# EAGLE board SIM7000 Shield ES (EAGLE 9.4.0)
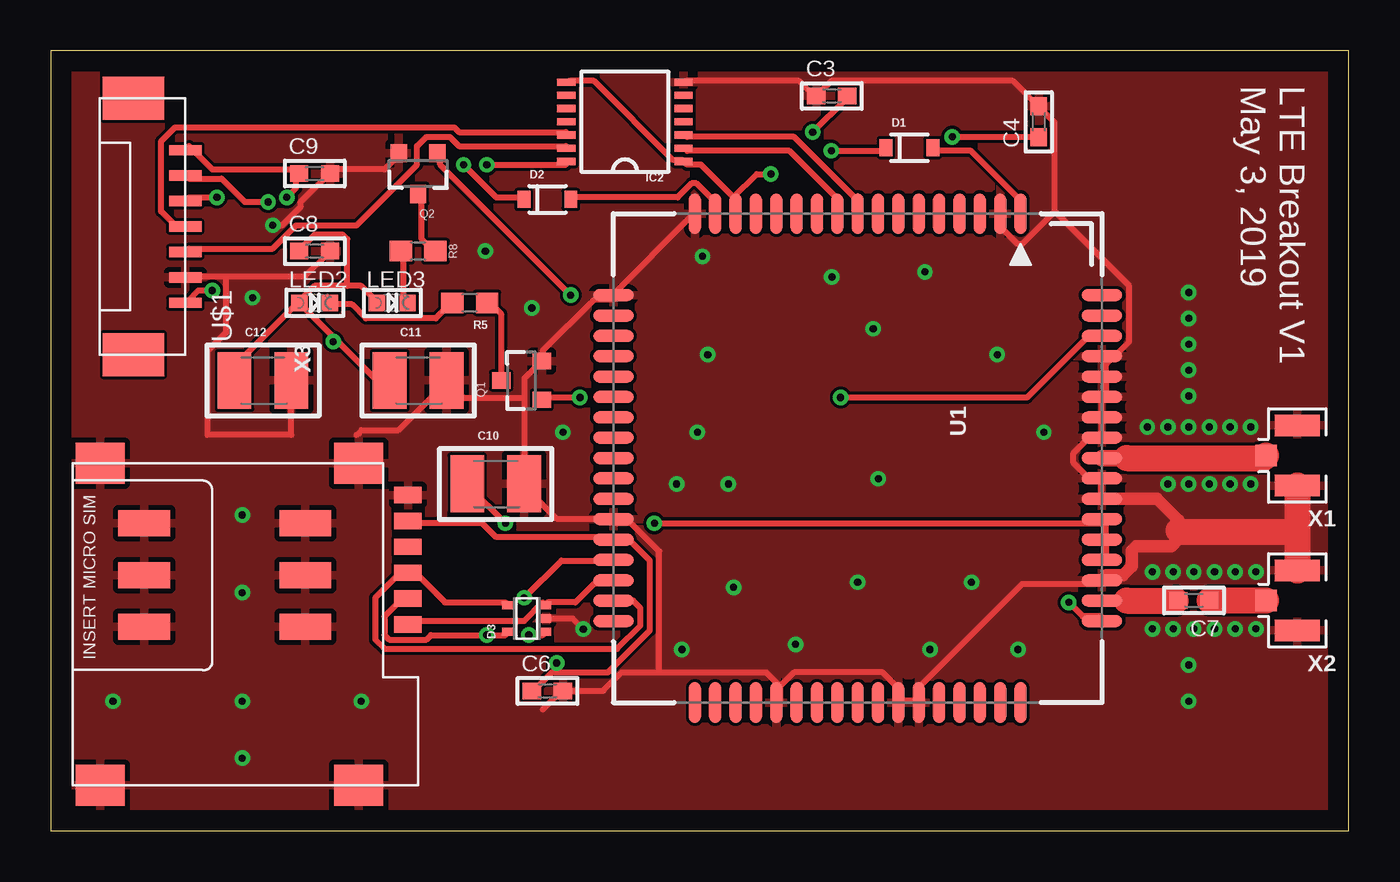
[diagram p0: board, top side]
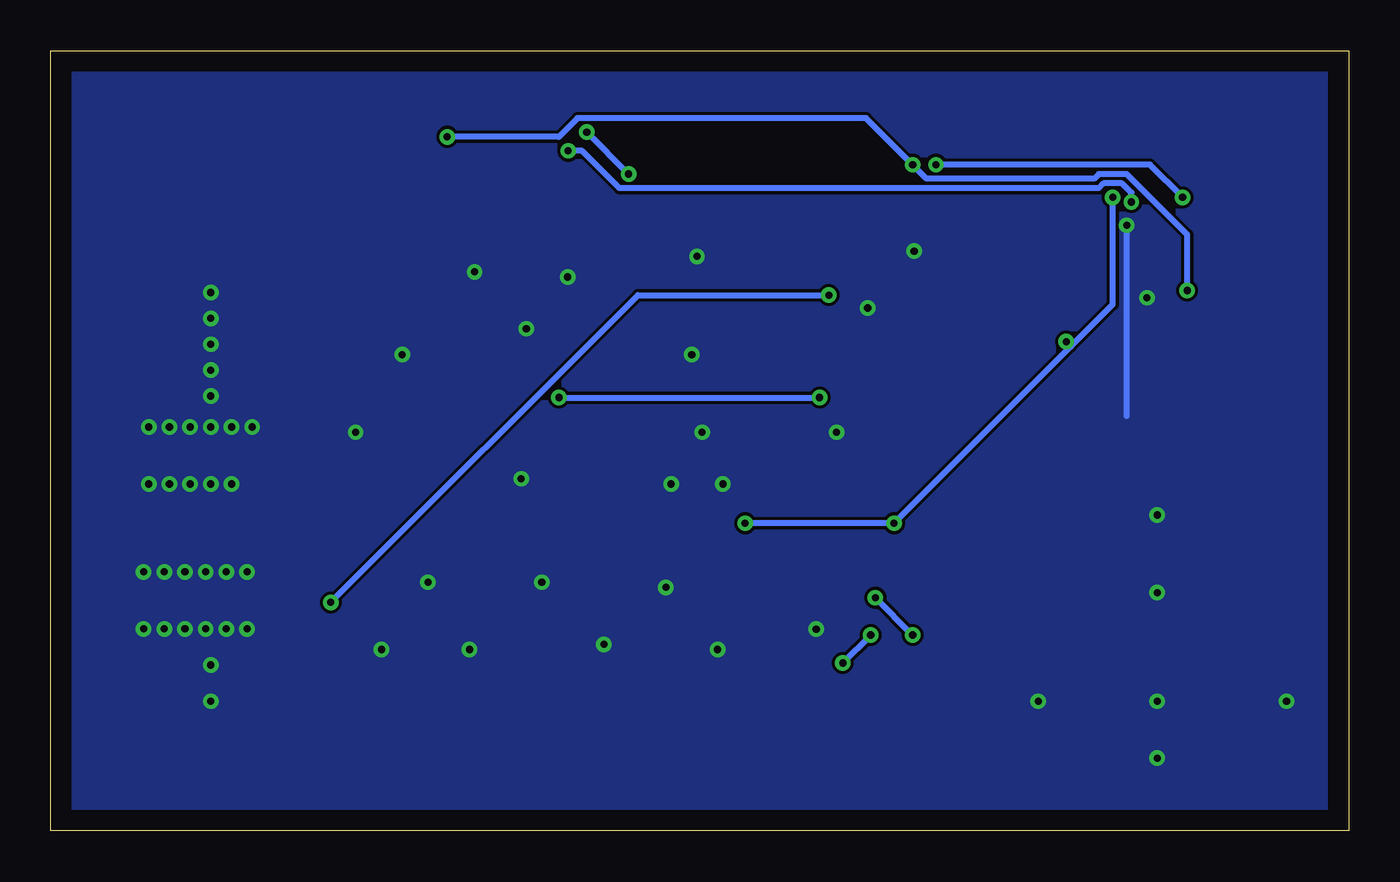
[diagram p1: board, bottom side, seen from below]

Size 63.73 x 38.28 mm. Coordinates in mm from the lower left corner, seen from the top.
Outline: 0,0 63.73,0 63.73,38.28 0,38.28 0,0
Copper layers (1*16): Top 0.035mm / dielectric 1.5mm / Bottom 0.035mm
Design rules "default *": minimum track width 10mil, minimum drill 0.35mm, track to track 6mil, track to pad 6mil, pad to pad 6mil, via to via 6mil, smd to smd 6mil, copper to edge 40mil, drill to drill 6mil, minimum pad ring 10mil, minimum via ring 8mil, stop-mask expansion 4mil, vias tented up to drill 20mil, thermal gap 10mil
Net classes: 0 default: width 0.305 mm; 1 power: width 0.406 mm

## Footprints (pad centres in the part's own frame; a part is rotated, then mirrored left to right if it is on the bottom)
CAP_0603 = smd 0.9 x 0.8: 1 -0.762,0; 2 0.762,0
1210 = smd 1.651 x 2.794: 1 -1.397,0; 2 1.397,0
SOD-323 = smd 0.63 x 0.83: A 1.15,0; C -1.15,0
SOT-353 = smd 0.4 x 0.5: 1 -0.65,-0.95; 2 0,-0.95; 3 0.65,-0.95; 4 0.65,0.95; 5 -0.65,0.95
TSSOP-14 = smd 0.9 x 0.35: 1 -2.875,1.95; 2 -2.875,1.3; 3 -2.875,0.65; 4 -2.875,0; 5 -2.875,-0.65; 6 -2.875,-1.3; 7 -2.875,-1.95; 8 2.875,-1.95; 9 2.875,-1.3; 10 2.875,-0.65; 11 2.875,0; 12 2.875,0.65; 13 2.875,1.3; 14 2.875,1.95
MICROBUILDER_CHIPLED_0603 = smd 0.8 x 0.8: A 0,-0.75; C 0,0.75
SOT23-3 = smd 0.8 x 0.9: 1 -0.95,-1; 2 0.95,-1; 3 0,1
0603 = smd 1.1 x 1: 1 -0.85,0; 2 0.85,0
SIM7000 = smd 2 x 0.6: 1 -12,8; 2 -12,7; 3 -12,6; 4 -12,5; 5 -12,4; 6 -12,3; 7 -12,2; 8 -12,1; 9 -12,0; 10 -12,-1; 11 -12,-2; 12 -12,-3; 13 -12,-4; 14 -12,-5; 15 -12,-6; 16 -12,-7; 17 -12,-8; 35 12,-8; 36 12,-7; 37 12,-6; 38 12,-5; 39 12,-4; 40 12,-3; 41 12,-2; 42 12,-1; 43 12,0; 44 12,1; 45 12,2; 46 12,3; 47 12,4; 48 12,5; 49 12,6; 50 12,7; 51 12,8 | smd 0.6 x 2: 18 -8,-12; 19 -7,-12; 20 -6,-12; 21 -5,-12; 22 -4,-12; 23 -3,-12; 24 -2,-12; 25 -1,-12; 26 0,-12; 27 1,-12; 28 2,-12; 29 3,-12; 30 4,-12; 31 5,-12; 32 6,-12; 33 7,-12; 34 8,-12; 52 8,12; 53 7,12; 54 6,12; 55 5,12; 56 4,12; 57 3,12; 58 2,12; 59 1,12; 60 0,12; 61 -1,12; 62 -2,12; 63 -3,12; 64 -4,12; 65 -5,12; 66 -6,12; 67 -7,12; 68 -8,12
JST1.25_7P = smd 0.5 x 1.6: 1 0,0; 2 1.25,0; 3 2.5,0; 4 3.75,0; 5 5,0; 6 6.25,0; 7 7.5,0 | smd 2.1 x 3: 8 -2.55,2.55; 9 10.05,2.55
U.FL = smd 2.2 x 1.05: 1 0,1.475; 2 0,-1.475 | smd 1.05 x 1.05: 3 1.525,0
MICROSIM_SOCKET = smd 0.8 x 1.35: C1 4.865,13.215; C2 7.405,13.215; C3 9.945,13.215; C5 3.595,13.215; C6 6.135,13.215; C7 8.675,13.215 | smd 2 x 2.4: GND@1 2.035,10.79; GND@2 17.835,10.79; GND@3 2.035,-1.89; GND@4 17.835,-1.89 | smd 1.27 x 2.54: GND@5 4.985,8.18; GND@6 7.525,8.18; GND@7 10.065,8.18; GND@8 4.985,0.26; GND@9 7.525,0.26; GND@10 10.065,0.26

## Placement (x,y rotation side)
C3  0.1uF  [CAP_0603]  38.35,36.07 0 top
C4  0.1uF  [CAP_0603]  48.51,34.8 90 top
C6  0.22uF  [CAP_0603]  24.38,6.86 0 top
C7  33pF  [CAP_0603]  56.13,11.3 180 top
C8  0.1uF  [CAP_0603]  12.95,28.45 0 top
C9  1uF  [CAP_0603]  12.95,32.26 0 top
C10  100uF  [1210]  21.84,17.02 0 top
C11  100uF  [1210]  18.03,22.1 0 top
C12  100uF  [1210]  10.41,22.1 0 top
D1  250mA/100V  [SOD-323]  42.16,33.53 0 top
D2  250mA/100V  [SOD-323]  24.38,30.99 0 top
D3  MSQA6V1W5T2G  [SOT-353]  23.37,10.41 90 top
IC2  TXB0104  [TSSOP-14]  28.19,34.8 180 top
LED2  Green  [MICROBUILDER_CHIPLED_0603]  12.95,25.91 270 top
LED3  Blue  [MICROBUILDER_CHIPLED_0603]  16.76,25.91 270 top
Q1  BSS138L  [SOT23-3]  23.11,22.1 90 top
Q2  BSS138L  [SOT23-3]  18.03,32.26 180 top
R5  1k  [0603]  20.57,25.91 180 top
R8  1k  [0603]  18.03,28.45 180 top
U1  [SIM7000]  39.62,18.29 270 top
U$1  JST_1.25_7P  [JST1.25_7P]  6.6,25.91 90 top
X1  LTE-uFL  [U.FL]  61.21,18.41 180 top
X2  GNSS-uFL  [U.FL]  61.21,11.3 180 top
X3  [MICROSIM_SOCKET]  4.32,20.07 270 top

## Library data of the parts
C3 C4 C6-C9 LED2 LED3 R5 R8 = Scott-Electrical
C10-C12 = TimWoo-Capacitors
D1 D2 = TimWoo-Diodes; PROD_ID: DIO-09646
D3 = TimWoo-Diodes
IC2 = Scott-ICs
Q1 Q2 = TimWoo-MOSFETs
U1 = TimWoo-RF
U$1 X3 = Scott-Connectors
X1 X2 = TimWoo-Connectors

## Nets
1.8V: C3.2 IC2.1 IC2.8 U1.15
3V3: C8.1 C9.1 C10.1 C11.1 C12.1 LED2.A LED3.A U1.55 U1.56 U1.57 U$1.7
5V: C4.1 IC2.14 U$1.1
GND: C3.1 C4.2 C6.2 C8.2 C9.2 C10.2 C11.2 C12.2 D3.2 IC2.7 Q1.2 Q2.2 U1.2 U1.17 U1.18 U1.29 U1.39 U1.45 U1.46 U1.54 U1.58 U1.59 U1.61 U1.62 U1.63 U1.64 U1.65 U$1.2 X1.1 X1.2 X2.1 X2.2 X3.C5 X3.GND@1 X3.GND@2 X3.GND@3 X3.GND@4 X3.GND@5 X3.GND@6 X3.GND@7 X3.GND@8 X3.GND@9 X3.GND@10
LTE_PWR: D1.C U$1.6
LTE_RST: D2.C U$1.5
LTE_RXD: IC2.2 U1.10
LTE_TXD: IC2.3 U1.9
N$1: C7.2 U1.53
N$2: D1.A U1.1
N$3: C7.1 X2.3
N$4: Q1.3 R5.1
N$5: LED2.C R5.2
N$9: LED3.C R8.2
N$10: Q2.3 R8.1
NETLIGHT: Q2.1 U1.52
NRESET: D2.A U1.16
PWR_STAT: Q1.1 U1.66
RF_ANT: U1.60 X1.3
SIM_CLK: D3.3 U1.32 X3.C3
SIM_DATA: D3.5 U1.31 X3.C7
SIM_RST: D3.4 U1.33 X3.C2
SIM_VCC: C6.1 D3.1 U1.30 X3.C1
UC_RXD: IC2.12 U$1.4
UC_TXD: IC2.13 U$1.3

## Tracks (layer width: path | path; a pad name or v marks a point on that pad's centre or on a via)
1.8V  (via drill 0.35)
  Top 0.305: 33.53,31.09 31.93,32.69 31.24,32.69 IC2.1 31.01,32.92 30.56,32.92 26.67,36.8 25.53,36.8 IC2.8 | 33.53,31.09 33.53,30.4 U1.15 33.53,31.09 | v37.41,34.29 39.01,35.89 C3.2 | v35.36,32.23 34.67,32.23 33.53,31.09
  Bottom 0.305: v35.36,32.23 v37.41,34.29
3V3  (via drill 0.35)
  Top 0.305: 14.55,26.75 15.24,26.75 15.93,26.06 LED3.A | 14.55,26.75 12.95,26.75 12.27,26.06 LED2.A | 14.55,26.75 14.55,29.03 14.33,29.26 12.95,29.26 12.27,28.57 C8.1 | C12.1 9.07,22.17 9.07,22.86 12.04,25.83 LED2.A | 14.1,24 12.27,25.83 LED2.A | 14.1,24 15.93,22.17 16.61,22.17 C11.1 | U$1.7 6.78,33.6 7.92,32.46 12.04,32.46 C9.1 12.04,32.23 12.04,31.55 v11.58,31.09 | U1.55 51.82,13.49 51.82,14.17 U1.56 51.82,14.4 51.82,15.09 U1.57 51.59,15.09 v29.64,15.09 | v22.33,15.09 20.5,16.92 C10.1 | v13.87,24 14.1,24
  Bottom 0.305: v29.64,15.09 v22.33,15.09 13.64,23.77 | v11.58,31.09 11.58,25.83 13.64,23.77 | 13.64,23.77 v13.87,24
5V  (via drill 0.35)
  Top 0.305: v21.41,32.69 25.3,32.69 IC2.14 | v7.92,26.52 7.24,26.52 6.78,26.06 U$1.1 | v44.27,34.06 48.39,34.06 C4.1
  Bottom 0.305: v7.92,26.52 7.92,29.26 10.9,32.23 12.27,32.23 12.5,32 20.73,32 v21.41,32.69 23.7,34.98 37.87,34.98 38.79,34.06 v44.27,34.06
GND  (via drill 0.35)
  Top 0.305: IC2.7 31.24,36.8 36.73,36.8 37.41,36.12 C3.1 38.33,36.8 47.24,36.8 48.39,35.66 C4.2 48.62,35.43 49.3,34.75 49.3,30.4 | 49.3,30.4 47.7,28.8 47.47,28.8 46.79,29.49 46.79,30.18 U1.2 | 51.82,22.17 51.82,21.49 U1.63 51.59,21.26 51.59,20.35 U1.62 51.59,20.12 51.59,19.43 U1.61 51.59,19.2 50.9,19.2 50.22,18.52 50.22,18.06 50.9,17.37 51.59,17.37 U1.59 51.59,17.14 51.59,16.46 U1.58 51.82,16.23 | 51.82,22.86 51.82,22.4 U1.64 51.82,22.17 | 51.82,22.86 51.82,23.09 U1.65 | 49.3,30.4 52.96,26.75 52.96,24 51.82,22.86 | U1.17 31.47,30.18 27.58,26.29 U1.18 27.58,26.06 26.67,26.06 24.16,23.55 24.16,23.09 Q1.2 23.93,22.86 23.24,22.17 23.24,21.26 | 23.24,21.26 C10.2 23.24,16.92 24.84,15.32 27.58,15.32 U1.29 27.81,15.09 28.5,15.09 29.87,13.72 29.87,7.77 | 8.61,27.2 6.78,27.2 U$1.2 | 8.61,27.2 12.5,27.2 13.64,28.35 C8.2 | 15.01,19.43 15.11,19.48 15.24,19.66 17.07,19.66 19.36,21.95 C11.2 20.27,21.26 23.24,21.26 | C12.2 11.81,19.43 7.7,19.43 7.7,23.55 8.61,24.46 8.61,27.2 | 35.81,7.09 35.81,6.4 U1.39 35.81,7.09 | 35.81,7.09 36.5,7.77 40.84,7.77 41.53,7.09 41.53,6.4 U1.45 41.76,6.4 42.44,6.4 U1.46 42.67,6.4 42.67,7.09 47.7,12.12 51.59,12.12 U1.54 | Q2.2 17.07,33.15 16.38,32.46 13.87,32.46 C9.2 13.64,32.23 12.27,30.86 12.27,30.63 11.35,29.72 v10.9,29.72 | 24.16,5.94 25.07,6.86 C6.2 27.13,6.86 28.04,7.77 29.87,7.77 | 35.81,7.09 35.13,7.77 29.87,7.77 | 51.82,22.17 51.62,22.17 | D3.2 25.62,10.41 v26.15,9.89
  Top 0.61: U1.58 54.32,16.29 55.37,15.24 55.37,14.73 55.37,14.32 55.02,13.97 53.31,13.97 53.08,13.75 53.08,12.97 52.64,12.53 51.87,12.53 U1.54
  Top 1.27: X1.1 61.21,14.66 | 61.21,14.66 X2.2 | 61.21,14.66 55.45,14.66 55.37,14.73
  Bottom 0.305: 10.9,20.35 v10.9,29.72
  other vias: 53.85,19.81 54.86,19.81 55.88,19.81 56.9,19.81 57.91,19.81 58.93,19.81 54.86,17.02 55.88,17.02 56.9,17.02 57.91,17.02 58.93,17.02 54.1,12.7 55.12,12.7 56.13,12.7 57.15,12.7 58.17,12.7 59.18,12.7 54.1,9.91 55.12,9.91 56.13,9.91 57.15,9.91 58.17,9.91 59.18,9.91 55.88,21.34 55.88,22.61 55.88,23.88 55.88,25.15 55.88,26.42 55.88,8.13 55.88,6.35 47.5,8.89 43.18,8.89 45.21,12.19 39.62,12.19 36.58,9.14 33.53,11.94 30.99,8.89 31.75,19.56 33.27,17.02 30.73,17.02 48.77,19.56 40.64,17.27 42.93,27.43 40.39,24.64 46.48,23.37 32.26,23.37 38.35,27.18 32,28.19 25.15,19.56 21.34,28.45 23.62,25.65 9.91,26.16 9.4,15.49 9.4,11.68 9.4,6.35 3.05,6.35 15.24,6.35 9.4,3.56
  pour Top: -0.51,39.88 -0.51,-1.02 67.56,-1.02 67.56,39.88
  pour Bottom: -0.76,40.39 -0.76,-1.02 68.07,-1.02 68.07,40.39
LTE_PWR  (via drill 0.35)
  Top 0.305: v38.33,33.38 40.84,33.38 D1.C | v10.67,30.86 9.52,30.86 8.38,32 6.78,32 U$1.6
  Bottom 0.305: v38.33,33.38 37.64,33.38 35.81,31.55 12.27,31.55 12.04,31.78 11.12,31.78 10.67,31.32 v10.67,30.86
LTE_RST  (via drill 0.35)
  Top 0.305: v20.27,32.69 21.87,31.09 23.01,31.09 D2.C | v8.15,31.09 6.78,31.09 U$1.5
  Bottom 0.305: v20.27,32.69 9.75,32.69 v8.15,31.09
LTE_RXD
  Top 0.305: IC2.2 31.24,33.38 36.27,33.38 38.56,31.09 38.56,30.4 U1.10
LTE_TXD
  Top 0.305: IC2.3 31.24,34.06 36.5,34.06 39.47,31.09 39.47,30.4 U1.9
N$1
  Top 0.305: 55.24,11.28 C7.2
  Top 0.61: U1.53 52.83,11.29
  Top 1.27: 52.83,11.29 55.23,11.29 55.24,11.28
N$2
  Top 0.305: D1.A 43.36,33.38 45.19,33.38 47.47,31.09 47.47,30.4 U1.1
N$3
  Top 1.27: C7.1 X2.3
N$4
  Top 0.305: Q1.3 22.1,22.17 22.1,25.38 21.64,25.83 R5.1
N$5
  Top 0.305: LED2.C 13.87,25.83 14.78,25.83 15.47,25.15 18.9,25.15 19.58,25.83 R5.2
N$9
  Top 0.305: LED3.C 17.3,26.06 17.3,28.35 R8.2
N$10
  Top 0.305: Q2.3 18.21,31.09 18.21,29.03 18.67,28.57 R8.1
NETLIGHT  (via drill 0.35)
  Top 0.305: v25.53,26.29 19.13,32.69 19.13,33.15 Q2.1 | v49.99,11.2 50.67,10.52 51.59,10.52 U1.52
  Bottom 0.305: v25.53,26.29 34.9,26.29 v49.99,11.2
NRESET
  Top 0.305: D2.A 25.76,31.09 30.79,31.09 31.47,31.78 31.7,31.78 32.61,30.86 32.61,30.4 U1.16
PWR_STAT  (via drill 0.35)
  Top 0.305: v25.98,21.26 24.16,21.26 Q1.1 | v38.79,21.26 47.93,21.26 50.9,24.23 51.59,24.23 U1.66
  Bottom 0.305: v38.79,21.26 v25.98,21.26
RF_ANT
  Top 0.813: U1.60 52.83,18.29
  Top 1.27: 52.83,18.29 59.56,18.29 X1.3
SIM_CLK
  Top 0.305: U1.32 27.58,12.12 26.67,12.12 25.76,11.2 24.38,11.2 D3.3 24.16,11.2 23.24,10.29 17.76,10.29 X3.C3
SIM_DATA  (via drill 0.35)
  Top 0.305: D3.5 22.33,9.6 v21.41,9.6 18.67,9.6 18.44,9.37 16.61,9.37 16.38,9.6 16.38,10.52 17.07,11.2 17.53,11.2 X3.C7 | v23.24,11.43 25.07,13.26 27.58,13.26 U1.31
  Bottom 0.305: v21.41,9.6 v23.24,11.43
SIM_RST
  Top 0.305: D3.4 22.33,11.2 19.36,11.2 17.76,12.8 X3.C2 17.53,12.57 17.07,12.57 15.93,11.43 15.93,9.37 16.38,8.91 27.81,8.91 28.96,10.07 28.96,10.92 28.59,11.29 U1.33
SIM_VCC  (via drill 0.35)
  Top 0.305: 24.84,7.77 24.61,7.77 23.7,6.86 C6.1 | 24.84,7.77 27.36,7.77 29.41,9.83 29.41,13.26 28.5,14.17 27.81,14.17 U1.30 27.58,14.4 21.87,14.4 21.18,15.09 17.76,15.09 X3.C1 | v23.47,9.6 24.16,9.6 D3.1 | 24.84,7.77 v24.84,8.23
  Bottom 0.305: v24.84,8.23 v23.47,9.6
UC_RXD
  Top 0.305: IC2.12 25.3,34.29 20.04,34.29 19.81,34.52 6.1,34.52 5.41,33.83 5.41,30.4 6.1,29.72 6.55,29.72 U$1.4
UC_TXD
  Top 0.305: IC2.13 25.3,33.6 20.04,33.6 19.58,34.06 18.44,34.06 17.98,33.6 17.98,32.69 15.01,29.72 12.04,29.72 10.9,28.57 6.78,28.57 U$1.3

## Text on the board
tPlace: LTE Breakout V1 / May 3, 2019